# EAGLE board huzzah32_driver (EAGLE 8.3.1)

Size 100 x 80 mm. Coordinates in mm from the lower left corner, seen from the top.
Outline: 0,0 100,0 100,80 0,80 0,0
Copper layers (1*16): Top 0.035mm / dielectric 1.5mm / Bottom 0.035mm
Design rules "default": minimum track width 6mil, minimum drill 0.35mm, track to track 6mil, track to pad 6mil, pad to pad 6mil, via to via 6mil, smd to smd 6mil, copper to edge 40mil, drill to drill 6mil, minimum pad ring 10mil, minimum via ring 8mil, stop-mask expansion 4mil, vias tented up to drill 0mil, thermal gap 10mil

## Footprints (pad centres in the part's own frame; a part is rotated, then mirrored left to right if it is on the bottom)
C050-035X075 = drill 0.813 octagon: 1 -2.54,0; 2 2.54,0
DCJACK_2MM_PTH = drill 2.8: GND 0,7.35; GNDBREAK 4.8,10.75 | drill 3.2: PWR 0,13.6
TO220H = drill 1.118 long: 1 -2.54,-10.16; 2 0,-10.16; 3 2.54,-10.16 | hole 3.302: 0,4.826
1X2-3.5MM = drill 1 pad 2.184: 1 1.8,0; 2 -1.7,0
70543-16 = drill 1.016 long: 1 -19.05,0; 2 -16.51,0; 3 -13.97,0; 4 -11.43,0; 5 -8.89,0; 6 -6.35,0; 7 -3.81,0; 8 -1.27,0; 9 1.27,0; 10 3.81,0; 11 6.35,0; 12 8.89,0; 13 11.43,0; 14 13.97,0; 15 16.51,0; 16 19.05,0
70543-12 = drill 1.016 long: 1 -13.97,0; 2 -11.43,0; 3 -8.89,0; 4 -6.35,0; 5 -3.81,0; 6 -1.27,0; 7 1.27,0; 8 3.81,0; 9 6.35,0; 10 8.89,0; 11 11.43,0; 12 13.97,0
22-23-2021 = drill 1 long: 1 -1.27,0; 2 1.27,0

## Placement (x,y rotation side)
C1  330nF  [C050-035X075]  72.39,8.89 0 top
C2  100nF  [C050-035X075]  72.39,3.81 0 top
CN1  [DCJACK_2MM_PTH]  95.25,5.08 90 top
IC1  7805T  [TO220H]  60.96,12.7 0 top
J1  1X2-3.5MM  [1X2-3.5MM]  87.63,17.78 90 top
X1  C-GRID-16-70543  [70543-16]  27.18,3.46 0 top
X2  C-GRID-12-70543  [70543-12]  32.18,23.96 0 top
X3  22-23-2021  [22-23-2021]  87.63,26.67 270 top
X4  22-23-2021  [22-23-2021]  77.47,26.67 270 top

## Library data of the parts
C1 C2 = resistor
CN1 J1 = adafruit
IC1 = linear
X1 X2 = lumiled_boards; OC_FARNELL: unknown; OC_NEWARK: unknown
X3 X4 = con-molex; MF: MOLEX; MPN: 22-23-2021; OC_FARNELL: 1462926; OC_NEWARK: 25C3832

## Nets
+3V3: X1.15
+5V: C2.1 IC1.3 X2.3 X4.2
A0_DAC2: X1.12
A1_DAC1: X1.11
A2_I34: X1.10
A3_I39: X1.9
A4_IO36: X1.8
A5_IO4: X1.7
EN: X2.2
GND: C1.2 C2.2 CN1.GND CN1.GNDBREAK IC1.2 J1.1 X1.13 X3.1 X4.1
IO12_A11: X2.5
IO13_A12: X2.4
IO14_A6: X2.10
IO15_A8: X2.8
IO16: X1.3
IO17: X1.2
IO21: X1.1
IO27_A10: X2.6
IO32_A7: X2.9
IO33_A9: X2.7
MISO: X1.4
MOSI: X1.5
N$26: X1.14
RESET: X1.16
SCK: X1.6
SCL: X2.11
SDA: X2.12
V+: C1.1 CN1.PWR IC1.1 J1.2 X3.2
VBAT: X2.1

## Tracks (layer width: path | path; a pad name or v marks a point on that pad's centre or on a via)
+5V  (3 unrouted)
GND  (8 unrouted)
V+  (4 unrouted)

## Text on the board
tPlace: ESP32